# EAGLE board topo-eagle-input (EAGLE 7.2.0)
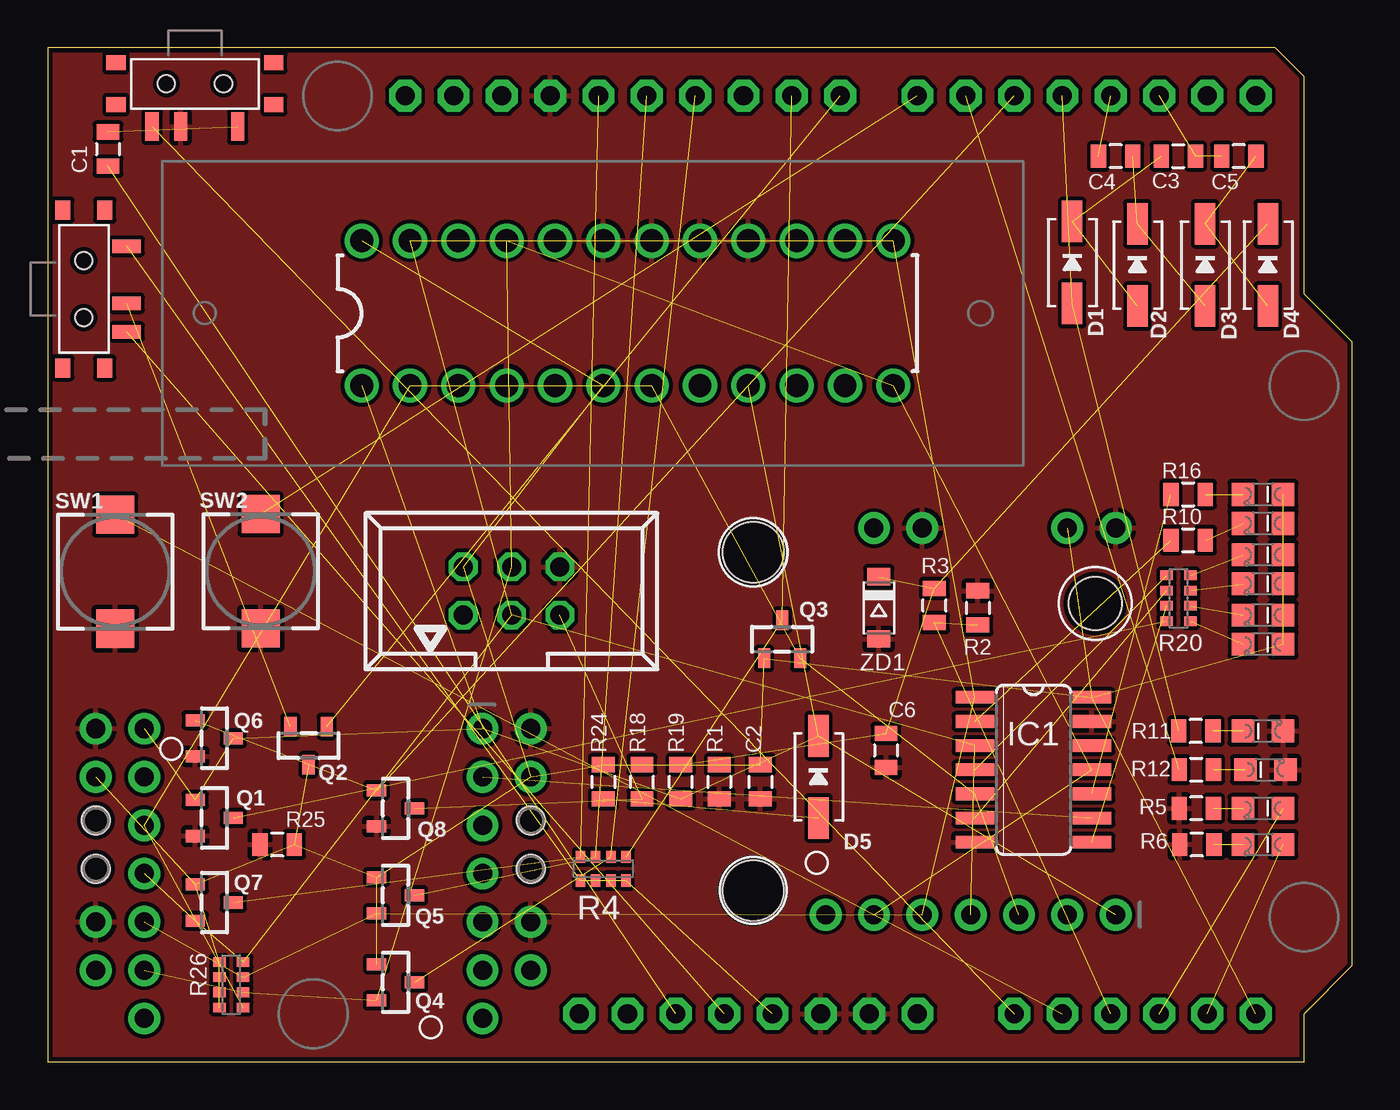
[diagram p0: board, top side]
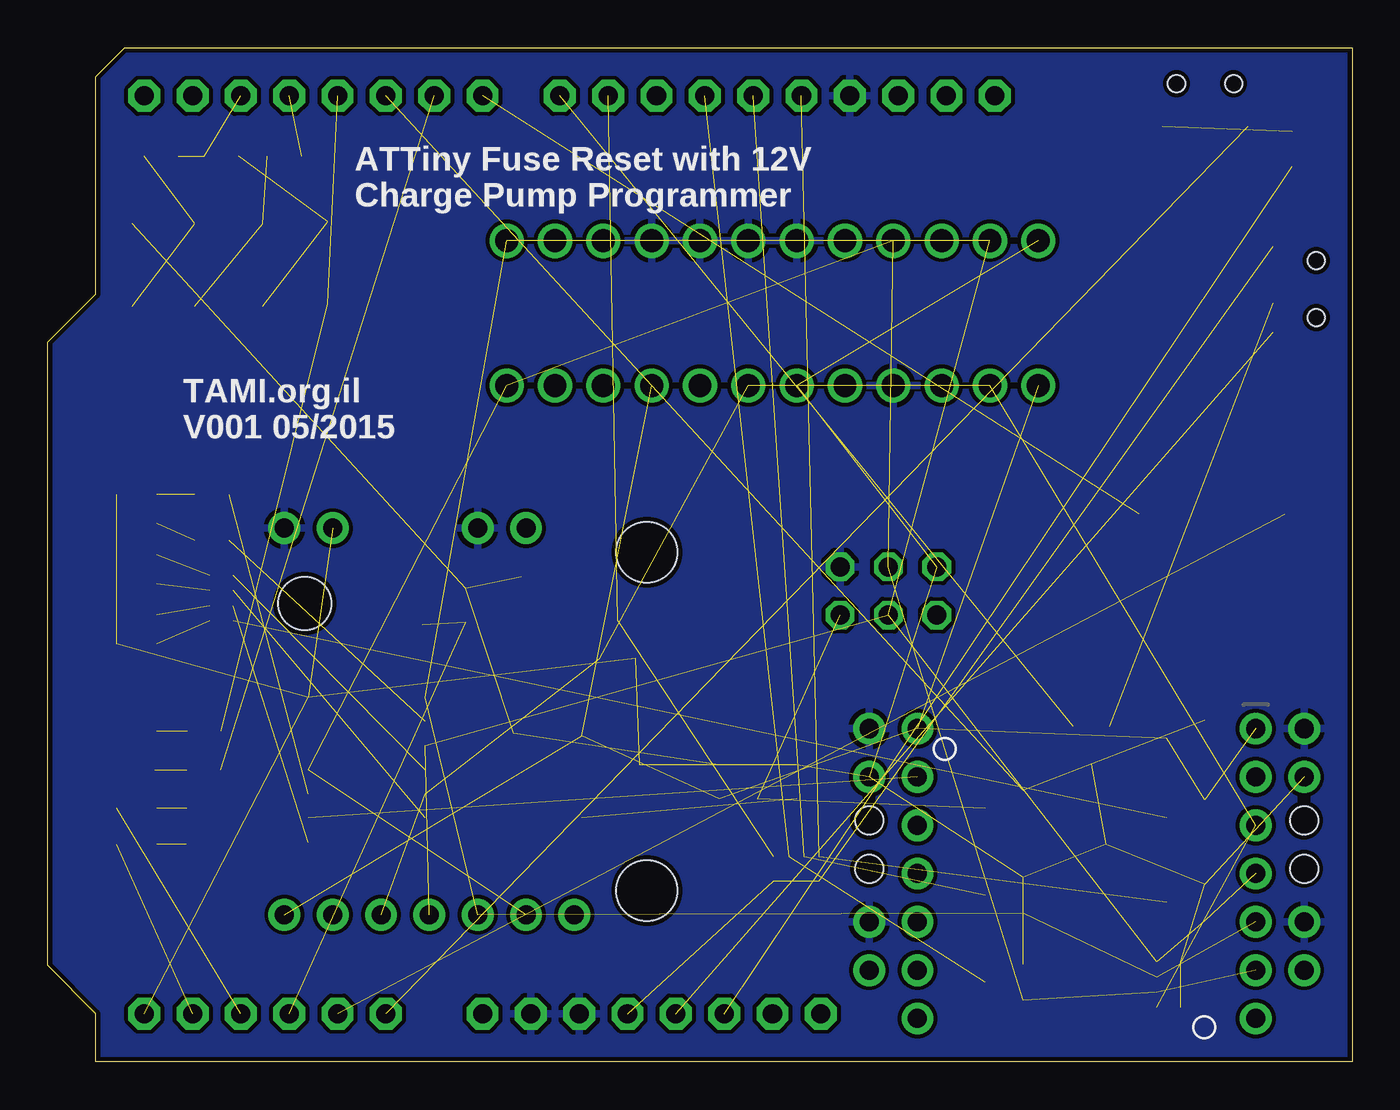
[diagram p1: board, bottom side, seen from below]

Size 68.58 x 53.34 mm. Coordinates in mm from the lower left corner, seen from the top.
Outline: 0,53.34 0,0 66.04,0 66.04,2.54 68.58,5.08 68.58,37.85 66.04,40.39 66.04,51.82 64.52,53.34 0,53.34
Copper layers (1*16): Top 0.035mm / dielectric 1.5mm / Bottom 0.035mm
Design rules "Elecrow_2-layer_eagle_rule": minimum track width 6mil, minimum drill 12mil, track to track 6mil, track to pad 6mil, pad to pad 6mil, via to via 6mil, smd to smd 0mil, copper to edge 10mil, drill to drill 10mil, minimum pad ring 10mil, minimum via ring 6mil, stop-mask expansion 2mil, vias tented up to drill 100mil, thermal gap 10mil
Net classes: 0 default: clearance 0.205 mm

## Footprints (pad centres in the part's own frame; a part is rotated, then mirrored left to right if it is on the bottom)
BREAKOUT_TAMI_NOHOLES = drill 1 pad 1.676: 1.PB5 -10.16,-8.89; 2.PB4 -10.16,-6.35; 3.PB3 -10.16,-3.81; 4.PB2 -10.16,-1.27; 5.PB1 -10.16,1.27; 6.PB0 -10.16,3.81; 7.GND -10.16,6.35; 8.GND 10.16,-8.89; 9.VCC 10.16,-6.35; 10.GND 10.16,1.27; 11.BAT 10.16,3.81
BREAKOUT_ATTAMI = drill 1 pad 1.676: 1.PB5 1.27,1.27; 2.PB4 1.27,3.81; 3.PB3 1.27,6.35; 4.PB2 1.27,8.89; 5.PB1 1.27,11.43; 6.PB0 1.27,13.97; 7.GND 1.27,16.51; 8.GND 21.59,1.27; 9.VCC 21.59,3.81; 10.GND 21.59,11.43; 11.BAT 21.59,13.97 | hole 3.2: 2.54,20.32; 20.32,20.32 | hole 2.8: 17.628,2.337
0805 = smd 0.8 x 1.2: 1 -0.9,0; 2 0.9,0
SOD-323 = smd 2.184 x 1.067: AQ 2.159,0; CQ -2.159,0
LED-805 = smd 1.2 x 1.2: A 0,-1.05; C 0,1.05
SO14 = smd 0.66 x 2.032: 1 -3.81,-3.073; 2 -2.54,-3.073; 3 -1.27,-3.073; 4 0,-3.073; 5 1.27,-3.073; 6 2.54,-3.073; 7 3.81,-3.073; 8 3.81,3.073; 9 2.54,3.073; 10 1.27,3.073; 11 0,3.073; 12 -1.27,3.073; 13 -2.54,3.073; 14 -3.81,3.073
1X02_PP_HOLES_ONLY = drill 0.889 pad 0.813: 1 0,0; 2 2.54,0 | hole 1.473: 0,0; 2.54,0
SOT23-R = smd 0.635 x 1.016: 1 -0.95,-1; 2 0.95,-1; 3 0,1
0603-ARV = smd 0.5 x 0.65: 1 -1.2,-0.625; 2 -0.4,-0.625; 3 0.4,-0.625; 4 1.2,-0.625; 5 1.2,0.625; 6 0.4,0.625; 7 -0.4,0.625; 8 -1.2,0.625
PUSHBUTTON_SMD_SJ = smd 2 x 2: P$1 3,0; P$2 -3,0
KPS-1290 = smd 0.7 x 1.5: O -2.25,2.25; P 0.75,2.25; S 2.25,2.25 | smd 1 x 0.8: P$1 -4.15,1.1; P$2 -4.15,-1.1; P$3 4.15,-1.1; P$4 4.15,1.1 | hole 0.9: -1.5,0; 1.5,0
ARDUINOR3-BPLACE = drill 1 pad 1.676 octagon: 3V 35.56,2.54; 5V 38.1,2.54; A0 50.8,2.54; A1 53.34,2.54; A2 55.88,2.54; A3 58.42,2.54; A4 60.96,2.54; A5 63.5,2.54; AREF 23.876,50.8; D0 63.5,50.8; D1 60.96,50.8; D2 58.42,50.8; D3 55.88,50.8; D4 53.34,50.8; D5 50.8,50.8; D6 48.26,50.8; D7 45.72,50.8; D8 41.656,50.8; D9 39.116,50.8; D10 36.576,50.8; D11 34.036,50.8; D12 31.496,50.8; D13 28.956,50.8; GND 26.416,50.8; GND1 43.18,2.54; GND2 40.64,2.54; IOREF 30.48,2.54; RESERVED 27.94,2.54; RESET 33.02,2.54; SCL 18.796,50.8; SDA 21.336,50.8; VIN 45.72,2.54
DIL-24-ZIF = drill 1.2: P$1 -13.97,-3.81; P$2 -11.43,-3.81; P$3 -8.89,-3.81; P$4 -6.35,-3.81; P$5 -3.81,-3.81; P$6 -1.27,-3.81; P$7 1.27,-3.81; P$8 3.81,-3.81; P$9 6.35,-3.81; P$10 8.89,-3.81; P$11 11.43,-3.81; P$12 13.97,-3.81; P$13 13.97,3.81; P$14 11.43,3.81; P$15 8.89,3.81; P$16 6.35,3.81; P$17 3.81,3.81; P$18 1.27,3.81; P$19 -1.27,3.81; P$20 -3.81,3.81; P$21 -6.35,3.81; P$22 -8.89,3.81; P$23 -11.43,3.81; P$24 -13.97,3.81
057-006-1 = drill 1 octagon: 1 -2.54,-1.27; 2 -2.54,1.27; 3 0,-1.27; 4 0,1.27; 5 2.54,-1.27; 6 2.54,1.27
SOD-123 = smd 0.91 x 1.22: A 1.635,0; C -1.635,0

## Placement (x,y rotation side)
A1  ATTami  [BREAKOUT_TAMI_NOHOLES]  12.7,8.64 180 top
A2  [BREAKOUT_ATTAMI]  57.4,6.48 90 top
A3  [BREAKOUT_TAMI_NOHOLES]  15.24,8.64 180 bottom
C1  10uF  [0805]  3.17,48.01 270 top
C2  2uF  [0805]  37.47,14.73 270 top
C3  0.2uF  [0805]  59.44,47.62 0 top
C4  0.2uF  [0805]  56.13,47.62 180 top
C5  0.2uF  [0805]  62.61,47.62 180 top
C6  2uF  [0805]  44.07,16.38 270 top
D1  1N4148  [SOD-323]  53.85,42.04 270 top
D2  1N4148  [SOD-323]  57.28,41.91 270 top
D3  1N4148  [SOD-323]  60.83,41.91 270 top
D4  1N4148  [SOD-323]  64.14,41.91 270 top
D5  1N4148  [SOD-323]  40.51,14.99 270 top
HBEAT  H.B.  [LED-805]  64.01,15.37 270 top
HV_O  HV  [LED-805]  63.88,17.4 270 top
IC1  74HC04D  [SO14]  51.82,15.37 270 top
ISP  PMD  [LED-805]  63.88,13.34 90 top
ISP_ERR  ERR  [LED-805]  63.88,11.43 90 top
JP1  M02POGO_PIN_HOLES_ONLY  [1X02_PP_HOLES_ONLY]  25.4,10.16 90 top
JP2  M02POGO_PIN_HOLES_ONLY  [1X02_PP_HOLES_ONLY]  2.54,10.16 90 top
PB0  PB0  [LED-805]  63.88,29.84 90 top
PB1  PB1  [LED-805]  63.88,28.32 90 top
PB2  PB2  [LED-805]  63.88,26.67 90 top
PB3  PB3  [LED-805]  63.88,25.15 90 top
PB4  PB4  [LED-805]  63.88,23.5 90 top
PB5  PB5  [LED-805]  63.88,21.97 90 top
Q1  BSS138  [SOT23-R]  8.76,12.83 270 top
Q2  PMV65XP  [SOT23-R]  13.72,16.64 180 top
Q3  BSS138  [SOT23-R]  38.61,22.23 0 top
Q4  BSS138  [SOT23-R]  18.29,4.19 270 top
Q5  BSS138  [SOT23-R]  18.29,8.76 270 top
Q6  BSS138  [SOT23-R]  8.76,17.02 270 top
Q7  BSS138  [SOT23-R]  8.76,8.38 270 top
Q8  BSS130  [SOT23-R]  18.29,13.34 270 top
R1  4.7K  [0805]  35.31,14.73 270 top
R2  100K  [0805]  48.9,23.88 270 top
R3  510K  [0805]  46.61,24 90 top
R4  4k7  [0603-ARV]  29.21,10.16 180 top
R5  220R  [0805]  60.38,13.34 180 top
R6  220R  [0805]  60.4,11.43 180 top
R10  330R  [0805]  59.94,27.43 0 top
R11  220R  [0805]  60.35,17.4 180 top
R12  220R  [0805]  60.38,15.37 0 top
R16  330R  [0805]  59.94,29.84 0 top
R18  4.7K  [0805]  31.24,14.73 90 top
R19  2.2K  [0805]  33.27,14.73 90 top
R20  330R  [0603-ARV]  59.44,24.38 90 top
R24  1k  [0805]  29.21,14.73 270 top
R25  1k  [0805]  12.06,11.43 180 top
R26  4k7  [0603-ARV]  9.65,4.06 90 top
SW1  [PUSHBUTTON_SMD_SJ]  3.56,25.78 270 top
SW2  [PUSHBUTTON_SMD_SJ]  11.2,25.81 270 top
SW3  SWITCH_SPDT  [KPS-1290]  7.75,51.44 180 top
SW4  SWITCH_SPDT  [KPS-1290]  1.91,40.64 270 top
U1  ARDUINOR3-BPLACE  [ARDUINOR3-BPLACE]  0,0 0 top
U$2  ZIFSOCKET-24  [DIL-24-ZIF]  30.48,39.37 0 top
X1  [057-006-1]  24.38,24.77 0 top
ZD1  12V_zener  [SOD-123]  43.69,23.88 270 top

## Library data of the parts
A1-A3 C1-C6 D1-D5 HBEAT HV_O ISP ISP_ERR PB0 PB1-PB5 R1-R3 R5 R6 R10-R12 R16 R18 R19 R24 R25 U1 = ATtami
IC1 = 74xx-eu
JP1 JP2 = SparkFun-Connectors
Q1-Q8 SW1 SW2 = microbuilder
R4 R20 R26 = SparkFun-Passives
SW3 SW4 = SparkFun-Electromechanical
U$2 = ATTiny Fuse Reset with 12V Charge Pump
X1 = con-panduit; OC_FARNELL: unknown; OC_NEWARK: unknown
ZD1 = dp_devices

## Nets
11.5V: C6.1 D4.CQ R3.2 R19.2 ZD1.C
ATTINY_VCC: A1.9.VCC A2.9.VCC A3.9.VCC C2.1 IC1.14 PB0.A PB1.A PB2.A PB3.A PB4.A PB5.A Q2.3 Q3.1 Q4.1 Q5.1 Q7.1 R1.1 R18.2 R24.1 R25.1 R26.5 R26.6 R26.7 R26.8 U1.A5 U$2.P$6 U$2.P$24 X1.2
GND: A1.8.GND A1.10.GND A2.8.GND A2.10.GND A3.8.GND A3.10.GND C2.2 C6.2 HBEAT.C HV_O.C IC1.7 IC1.13 Q1.2 Q6.2 Q8.2 R1.2 R2.1 R5.2 R6.2 R25.2 SW1.P$1 SW2.P$1 SW3.P U1.GND U1.GND1 U1.GND2 U$2.P$4 U$2.P$16 U$2.P$17 U$2.P$18 U$2.P$19 X1.6 ZD1.A
HV/RESET: A1.1.PB5 A2.1.PB5 A3.1.PB5 D5.CQ Q1.1 Q6.3 R19.1 U$2.P$1 U$2.P$9
HV_OFF(RESET): Q6.1 Q8.1 U1.D5
HV_SENSE: R2.2 R3.1 U1.A2
ISP_RESET: Q8.3 R18.1 X1.5
N$1: Q2.2 SW4.P
N$2: Q3.3 R4.1 U1.D9
N$3: SW3.S U1.A0
N$4: HV_O.A R11.1
N$5: D5.AQ R24.2
N$6: ISP.C R5.1
N$7: A1.2.PB4 IC1.9
N$8: Q4.3 R4.2 U1.D11
N$9: SW1.P$2 U1.A1
N$10: C3.1 D1.CQ D2.AQ
N$11: C4.1 D2.CQ D3.AQ
N$12: C5.1 D3.CQ D4.AQ
N$13: IC1.10 R16.1
N$14: C1.1 SW3.O
N$15: ISP_ERR.C R6.1
N$16: SW4.S U1.3V
N$17: ISP_ERR.A U1.A4
N$18: ISP.A U1.A3
N$19: R12.1 U1.D6
N$20: HBEAT.A R12.2
N$21: IC1.2 R10.1
N$22: SW2.P$2 U1.D7
N$23: PB2.C R20.4
N$24: IC1.4 R20.5
N$25: PB1.C R10.2
N$26: IC1.6 R20.6
N$27: PB0.C R16.2
N$28: IC1.8 R20.7
N$29: PB3.C R20.3
N$30: PB4.C R20.2
N$31: PB5.C R20.1
N$32: Q1.3 R20.8
N$33: C1.2 U1.RESET
N$34: Q7.3 R4.4 U1.D13
N$36: X1.1
N$37: Q5.3 R4.3 U1.D12
P1: C3.2 C5.2 U1.D2
P2: C4.2 U1.D3
PUMP_VCC: D1.AQ R11.2 U1.D4
SCI: A2.3.PB3 A3.3.PB3 IC1.5 Q3.2 R26.1 U$2.P$2 U$2.P$7
SDI_MOSI: A2.6.PB0 A3.6.PB0 IC1.11 Q4.2 R26.2 U$2.P$12 U$2.P$21 X1.4
SDO-SCK: A2.4.PB2 A3.4.PB2 IC1.3 Q7.2 R26.4 U$2.P$14 U$2.P$23 X1.3
SII-MISO: A2.5.PB1 A3.5.PB1 IC1.1 Q5.2 R26.3 U$2.P$13 U$2.P$22
VCC: R4.5 R4.6 R4.7 R4.8 SW4.O U1.5V
VCC_OFF: Q2.1 U1.D8
VIN: U1.VIN

## Tracks (layer width: path | path; a pad name or v marks a point on that pad's centre or on a via)
11.5V  (4 unrouted)
ATTINY_VCC  (27 unrouted)
GND
  pour Top: -3.05,54.74 -3.05,-1.14 3.43,-7.62 64.39,-7.62 75.44,3.43 75.44,51.56 70.99,56.01 -1.27,56.01 -2.29,57.02
  pour Bottom: -1.27,54.61 -1.27,-1.27 69.85,-1.27 69.85,53.34 0,54.61
HV/RESET  (8 unrouted)
HV_OFF(RESET)  (2 unrouted)
HV_SENSE  (2 unrouted)
ISP_RESET  (2 unrouted)
N$1  (1 unrouted)
N$2  (2 unrouted)
N$3  (1 unrouted)
N$4  (1 unrouted)
N$5  (1 unrouted)
N$6  (1 unrouted)
N$7  (1 unrouted)
N$8  (2 unrouted)
N$9  (1 unrouted)
N$10  (2 unrouted)
N$11  (2 unrouted)
N$12  (2 unrouted)
N$13  (1 unrouted)
N$14  (1 unrouted)
N$15  (1 unrouted)
N$16  (1 unrouted)
N$17  (1 unrouted)
N$18  (1 unrouted)
N$19  (1 unrouted)
N$20  (1 unrouted)
N$21  (1 unrouted)
N$22  (1 unrouted)
N$23  (1 unrouted)
N$24  (1 unrouted)
N$25  (1 unrouted)
N$26  (1 unrouted)
N$27  (1 unrouted)
N$28  (1 unrouted)
N$29  (1 unrouted)
N$30  (1 unrouted)
N$31  (1 unrouted)
N$32  (1 unrouted)
N$33  (1 unrouted)
N$34  (2 unrouted)
N$37  (2 unrouted)
P1  (2 unrouted)
P2  (1 unrouted)
PUMP_VCC  (2 unrouted)
SCI  (6 unrouted)
SDI_MOSI  (7 unrouted)
SDO-SCK  (7 unrouted)
SII-MISO  (6 unrouted)
VCC  (5 unrouted)
VCC_OFF  (1 unrouted)

## Text on the board
bNames: ATTiny Fuse Reset with 12V / Charge Pump Programmer | TAMI.org.il / V001 05/2015
Name: |< digital 13-8>| | |< digital 7-2 >| | gnd | TX | RX | HV | ISP | |<8 pin>| | |<--14 pin-->| | 5V | 3.3V | TAMI ATtiny / HV / ISP / Programmer | test | load | |<8 pin>| | |<--14 pin-->| | PB0 | PB1 | PB2 | PB3 | ISP | PB4 | PB5 | ATTami | HV | H.B. | prog | ERR | ATTami | rst | 3v3 | 5V | -GND- | VIN | |< analog 0-5 >|